# EAGLE board Motorplatine (EAGLE 7.2.0)
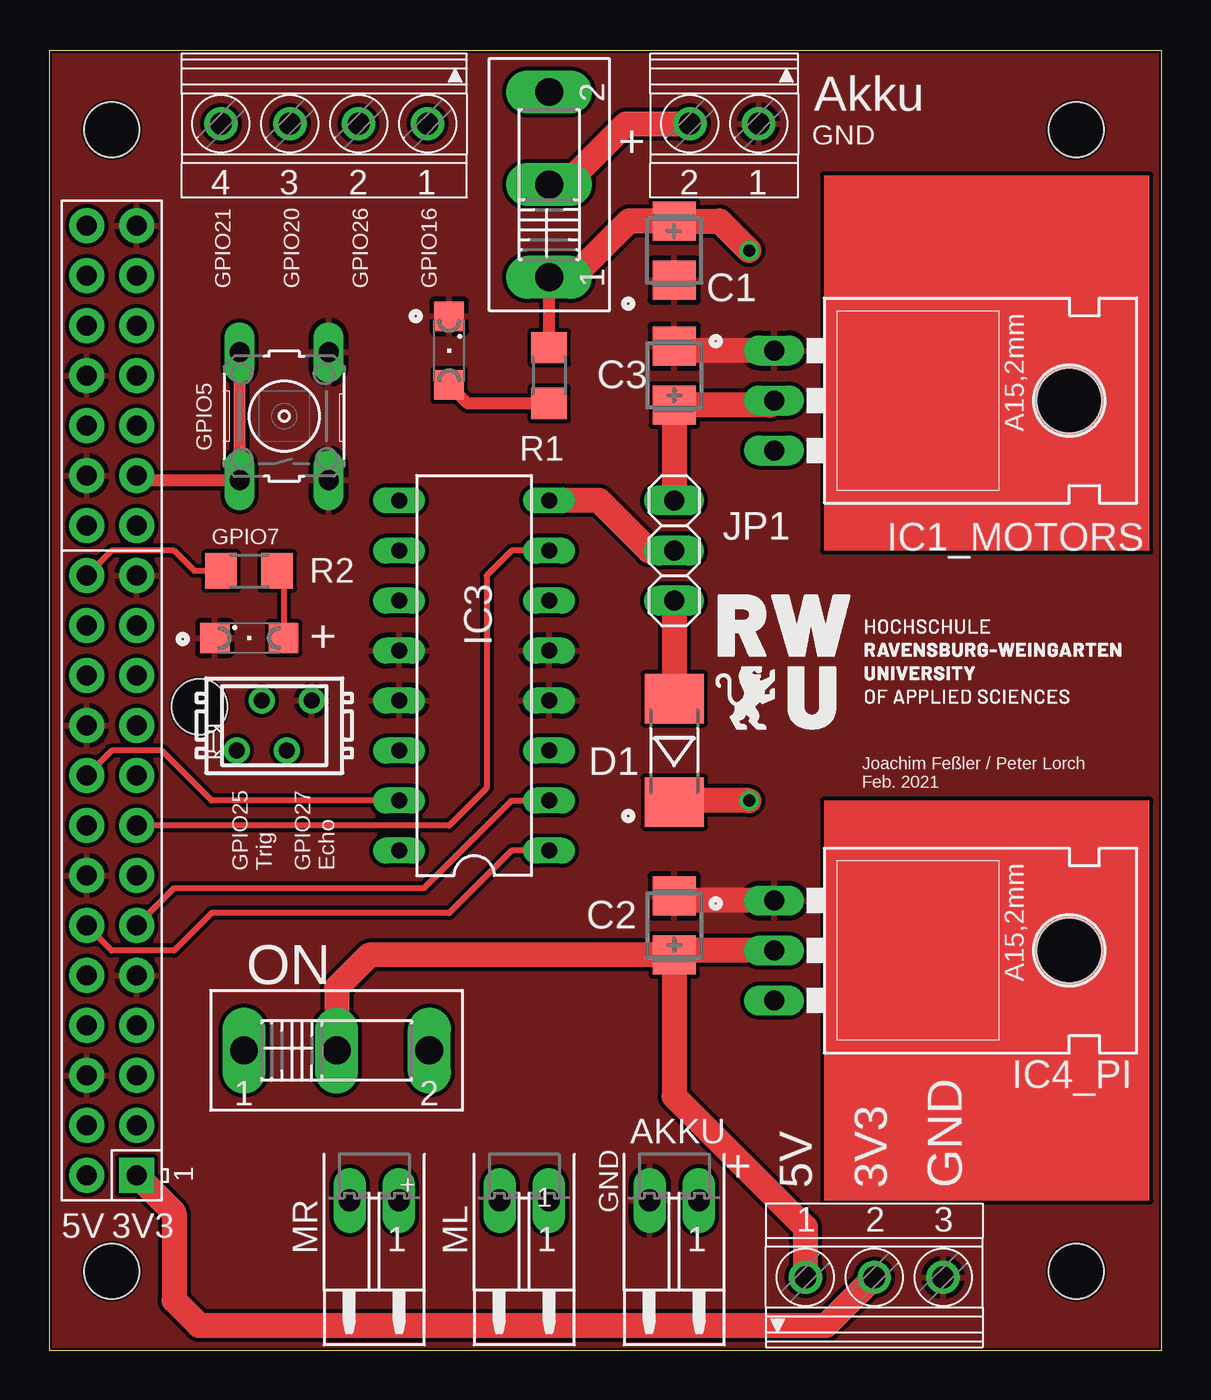
[diagram p0: board, top side]
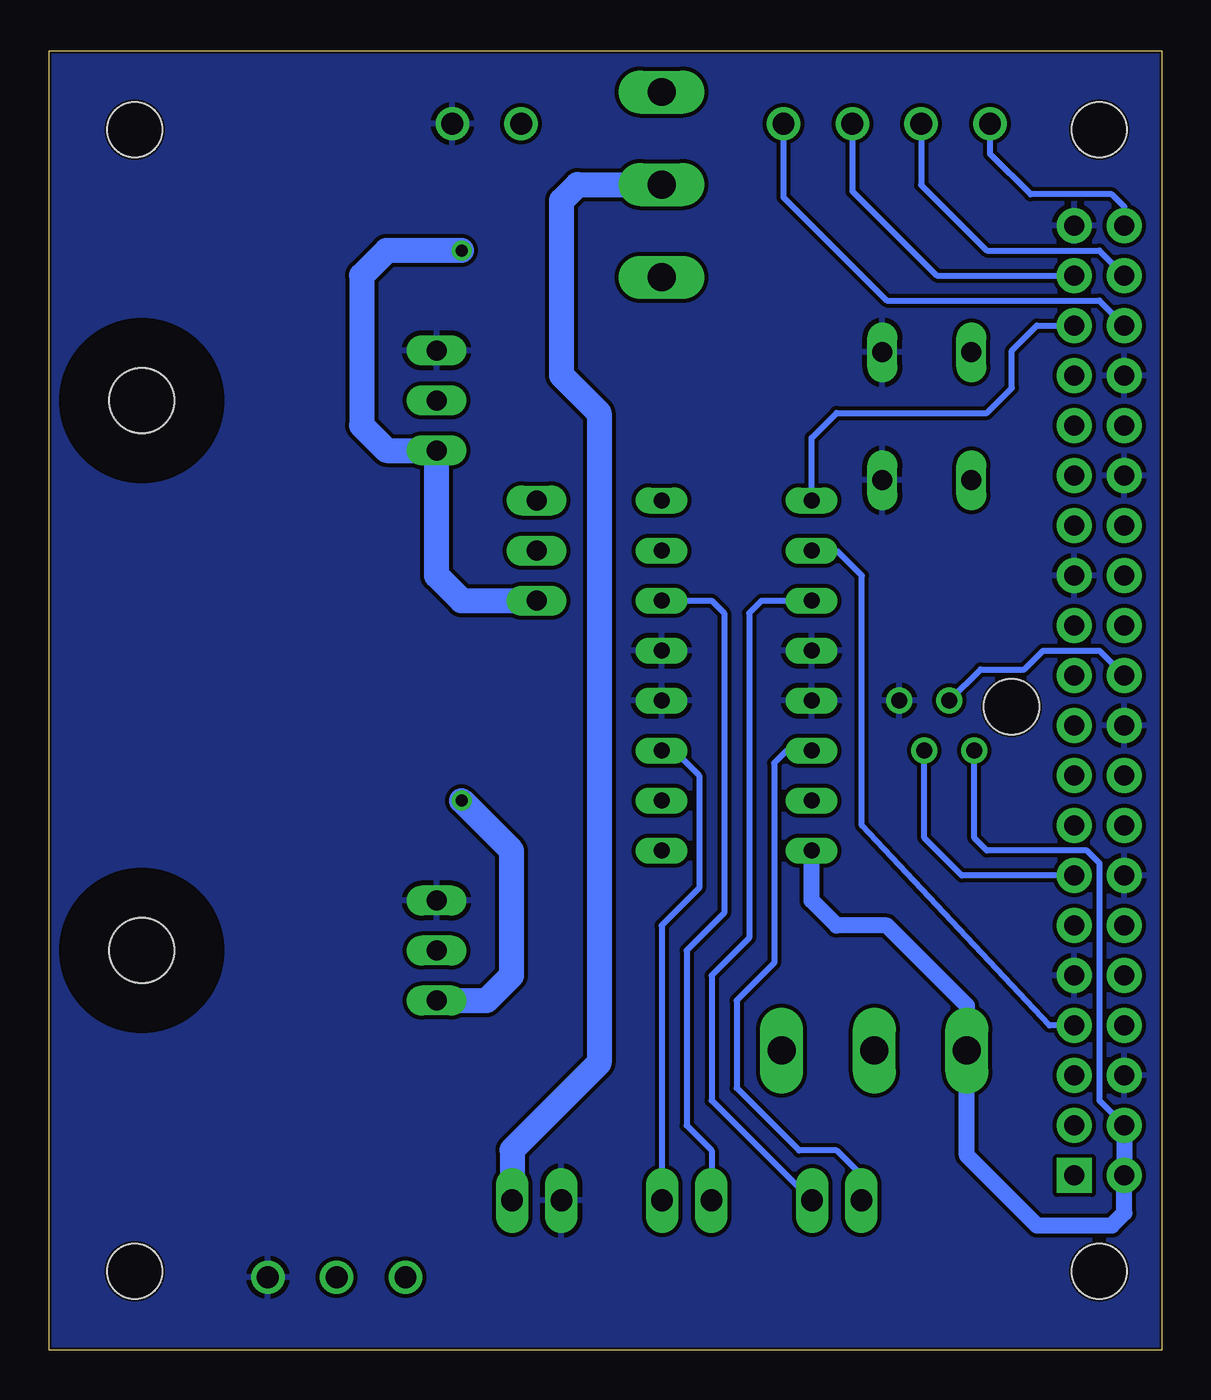
[diagram p1: board, bottom side, seen from below]

Size 56.52 x 66.04 mm. Coordinates in mm from the lower left corner, seen from the top.
Outline: 56.52,66.04 0,66.04 0,0 56.52,0 56.52,66.04
Copper layers (1*16): Top 0.035mm / dielectric 1.5mm / Bottom 0.035mm
Design rules "default *": minimum track width 10mil, minimum drill 24mil, track to track 8mil, track to pad 8mil, pad to pad 8mil, via to via 8mil, smd to smd 8mil, copper to edge 5mil, drill to drill 10mil, minimum pad ring 10mil, minimum via ring 8mil, stop-mask expansion 4mil, vias tented up to drill 0mil, thermal gap 10mil
Holes 2.8 mm at 3.17,4.02 3.17,62.02 52.17,62.02 52.17,4.02 7.63,32.7

## Footprints (pad centres in the part's own frame; a part is rotated, then mirrored left to right if it is on the bottom)
SML1206 = smd 1.5 x 1.5: A 1.75,0; C -1.75,0
02PA = drill 1.1 long: 1 -1.25,0; 2 1.25,0
CT3528 = smd 2 x 2.2: + -1.5,0; - 1.5,0
MELF-MLL41 = smd 2.5 x 3: A 2.625,0; C -2.625,0
317TL = drill 1.016 long: 1 -2.54,-3.81; 2 0,-3.81; 3 2.54,-3.81 | hole 3.302: 0,11.176
DIL16 = drill 0.813 long: 1 -8.89,-3.81; 2 -6.35,-3.81; 3 -3.81,-3.81; 4 -1.27,-3.81; 5 1.27,-3.81; 6 3.81,-3.81; 7 6.35,-3.81; 8 8.89,-3.81; 9 8.89,3.81; 10 6.35,3.81; 11 3.81,3.81; 12 1.27,3.81; 13 -1.27,3.81; 14 -3.81,3.81; 15 -6.35,3.81; 16 -8.89,3.81
1X03 = drill 1.016 long: 1 -2.54,0; 2 0,0; 3 2.54,0
R1206 = smd 1.6 x 1.803: 1 -1.422,0; 2 1.422,0
255SB = drill 1.4 pad 2.184 long: 1 -4.7,0; 2 0,0; 3 4.7,0
B3F-10XX = drill 1.016 long: 1 -3.251,2.261; 2 3.251,2.261; 3 -3.251,-2.261; 4 3.251,-2.261
MICROMATCH-4 = drill 0.813: 1 1.905,1.27; 2 0.635,-1.27; 3 -0.635,1.27; 4 -1.905,-1.27
RASPI_GPIO_B+_PIN = drill 1 pad 1.778 square: 1 -24.13,-1.27 | drill 1 pad 1.778: 2 -24.13,1.27; 3 -21.59,-1.27; 4 -21.59,1.27; 5 -19.05,-1.27; 6 -19.05,1.27; 7 -16.51,-1.27; 8 -16.51,1.27; 9 -13.97,-1.27; 10 -13.97,1.27; 11 -11.43,-1.27; 12 -11.43,1.27; 13 -8.89,-1.27; 14 -8.89,1.27; 15 -6.35,-1.27; 16 -6.35,1.27; 17 -3.81,-1.27; 18 -3.81,1.27; 19 -1.27,-1.27; 20 -1.27,1.27; 21 1.27,-1.27; 22 1.27,1.27; 23 3.81,-1.27; 24 3.81,1.27; 25 6.35,-1.27; 26 6.35,1.27; 27 8.89,-1.27; 28 8.89,1.27; 29 11.43,-1.27; 30 11.43,1.27; 31 13.97,-1.27; 32 13.97,1.27; 33 16.51,-1.27; 34 16.51,1.27; 35 19.05,-1.27; 36 19.05,1.27; 37 21.59,-1.27; 38 21.59,1.27; 39 24.13,-1.27; 40 24.13,1.27
1751264 = drill 1.1 pad 1.7: 1 -5.25,-0.1; 2 -1.75,-0.1; 3 1.75,-0.1; 4 5.25,-0.1
1751248 = drill 1.1 pad 1.7: 1 -1.75,-0.1; 2 1.75,-0.1
1751251 = drill 1.1 pad 1.7: 1 -3.5,-0.1; 2 0,-0.1; 3 3.5,-0.1

## Placement (x,y rotation side)
5V-ON  [SML1206]  20.32,50.8 270 top
5V-ON1  [SML1206]  10.16,36.2 0 top
AKKU  [02PA]  31.75,7.62 180 top
C1  10μF  [CT3528]  31.75,55.88 270 top
C2  10μF  [CT3528]  31.75,21.59 90 top
C3  10μF  [CT3528]  31.75,49.53 90 top
D1  SA265 DIO  [MELF-MLL41]  31.75,30.48 90 top
IC1_MOTORS  LM1084  [317TL]  40.64,48.26 270 top
IC3  L293D  [DIL16]  21.59,34.29 90 top
IC4_PI  LM1084  [317TL]  40.64,20.32 270 top
JP1  [1X03]  31.75,40.64 90 top
ML  [02PA]  24.13,7.62 180 top
MR  [02PA]  16.51,7.62 180 top
R1  560R  [R1206]  25.4,49.53 90 top
R2  560R  [R1206]  10.16,39.6 180 top
S1  [255SB]  25.4,59.23 90 top
S2  [B3F-10XX]  11.94,47.47 90 top
S3  [255SB]  14.61,15.24 0 top
X1  MICROMATCH-4  [MICROMATCH-4]  11.43,31.75 180 top
X2  RASPI_GPIO_B+#_PIN  [RASPI_GPIO_B+_PIN]  3.17,33.02 90 top
X3  1751264  [1751264]  13.97,62.23 180 top
X4  1751248  [1751248]  34.29,62.23 180 top
X5  1751251  [1751251]  41.91,3.81 0 top

## Library data of the parts
5V-ON 5V-ON1 = led-Task
AKKU ML MR = con-amp-quick; OC_FARNELL: unknown; OC_NEWARK: unknown
C1-C3 = rcl
D1 = diode
IC1_MOTORS IC4_PI = Spg.reg
IC3 = st-microelectronics; MPN: L293D; OC_FARNELL: 9589619; OC_NEWARK: 56P8249
JP1 = pinhead
R1 R2 = Widerstände; SPICEPREFIX: R
S1 S3 = switch
S2 = switch-omron; MPN: B3F-1000; OC_FARNELL: 176432; OC_NEWARK: 36M3542
X1 = con-amp-micromatch; MPN: 7-215464-4; OC_FARNELL: 3784629; OC_NEWARK: 19R8124
X2 = raspberrypi_bastelstube_v13
X3 = Con-2-10-RM3,5; MPN: 1751264; OC_FARNELL: unknown; OC_NEWARK: 10R0934
X4 = con-phoenix-350; OC_FARNELL: unknown; OC_NEWARK: unknown
X5 = Con-2-10-RM3,5; OC_FARNELL: unknown; OC_NEWARK: unknown

## Nets
1Y: IC3.3 ML.1
2Y: IC3.6 ML.2
3V3B: X2.17
3Y: IC3.11 MR.1
4Y: IC3.14 MR.2
+3V3: X2.1 X5.2
+5V: C2.+ IC4_PI.2 S3.2 X5.1
ECHO/GPIO27: X1.3 X2.13
GND: 5V-ON1.C 5V-ON.C AKKU.2 C1.- C2.- C3.- IC1_MOTORS.1 IC3.4 IC3.5 IC3.12 IC3.13 IC4_PI.1 S2.3 S2.4 X1.4 X2.6 X2.9 X2.14 X2.20 X2.25 X2.30 X2.34 X2.39 X4.1 X5.3
GPIO5: S2.1 S2.2 X2.29
GPIO16: X2.36 X3.1
GPIO20: X2.38 X3.3
GPIO21: X2.40 X3.4
GPIO26: X2.37 X3.2
M1_E1: IC3.2 X2.11
M1_E2: IC3.7 X2.15
M1_PWM: IC3.1 X2.12
M2_E1: IC3.10 X2.7
M2_E2: IC3.15 X2.18
M2_PWM: IC3.9 X2.35
N$1: 5V-ON1.A R2.1
N$2: R2.2 X2.26
N$3: C3.+ IC1_MOTORS.2 JP1.3
N$5: AKKU.1 S1.2 X4.2
N$7: D1.C IC4_PI.3
N$12: 5V-ON.A R1.1
TRIG/GPIO25: X1.2 X2.22
V+: IC3.16 S3.1 X1.1 X2.2 X2.4
VCC: C1.+ D1.A IC1_MOTORS.3 JP1.1 R1.2 S1.1
VDD: IC3.8 JP1.2

## Tracks (layer width: path | path; a pad name or v marks a point on that pad's centre or on a via)
1Y
  Bottom 0.305: IC3.3 24.77,30.48 23.5,29.21 23.5,23.5 25.4,21.59 25.4,7.64 ML.1
2Y
  Bottom 0.305: IC3.6 22.86,38.1 22.23,37.47 22.23,22.23 24.13,20.32 24.13,11.43 22.86,10.16 22.86,7.64 ML.2
3Y
  Bottom 0.305: IC3.11 20.32,38.1 20.95,37.47 20.95,20.95 22.86,19.05 22.86,12.7 17.76,7.6 MR.1
4Y
  Bottom 0.305: IC3.14 19.05,30.48 19.68,29.84 19.68,19.68 21.59,17.78 21.59,13.34 18.41,10.16 16.51,10.16 15.3,8.95 15.3,7.66 MR.2
+3V3
  Top 1.27: X2.1 6.35,6.99 6.35,2.54 7.62,1.27 39.47,1.27 X5.2
+5V
  Top 1.27: IC4_PI.2 31.98,20.32 C2.+ | C2.+ 31.75,12.91 38.41,6.25 X5.1 | C2.+ 16.28,20.09 14.61,18.41 S3.2
ECHO/GPIO27
  Bottom 0.305: X2.13 10.16,24.13 12.06,26.04 X1.3
GND
  Top 1.27: IC1_MOTORS.1 31.98,50.8 C3.- | IC4_PI.1 31.98,22.86 C2.-
  pour Top: 0,0 0,66.04 56.52,66.04 56.52,0
  pour Bottom: 0,0 0,66.04 56.52,66.04 56.52,0
GPIO5
  Top 0.61: X2.29 4.68,44.22 S2.1 S2.2
GPIO16
  Bottom 0.305: X3.1 19.22,58.59 13.97,53.34 3.17,53.34 X2.36
GPIO20
  Bottom 0.305: X3.3 12.22,59.21 8.89,55.88 3.17,55.88 X2.38
GPIO21
  Bottom 0.305: X2.40 1.91,58.1 2.54,58.74 6.67,58.74 8.72,60.79 X3.4
GPIO26
  Bottom 0.305: X3.2 15.72,58.9 11.43,54.61 X2.37
M1_E1
  Top 0.305: IC3.2 23.5,27.94 19.05,23.5 6.35,23.5 X2.11
M1_E2
  Top 0.305: IC3.7 23.5,40.64 22.23,39.37 22.23,28.57 20.32,26.67 X2.15
M1_PWM
  Top 0.305: IC3.1 23.5,25.4 20.32,22.23 8.26,22.23 6.35,20.32 3.17,20.32 X2.12
M2_E1
  Bottom 0.305: IC3.10 16.51,40.64 15.24,39.37 15.24,26.67 5.71,16.51 X2.7
M2_E2
  Top 0.305: IC3.15 8.26,27.94 5.71,30.48 3.17,30.48 X2.18
M2_PWM
  Bottom 0.305: IC3.9 17.78,46.35 16.51,47.62 8.89,47.62 7.62,48.9 7.62,50.8 6.35,52.07 X2.35
N$1
  Top 0.305: R2.1 11.91,39.36 5V-ON1.A
N$2
  Top 0.305: R2.2 7.39,39.6 6.35,40.64 3.17,40.64 X2.26
N$3
  Top 1.27: IC1_MOTORS.2 36.6,48.03 C3.+ JP1.3
N$5
  Top 1.27: X4.2 29.31,62.33 26.21,59.23 S1.2
  Bottom 1.27: AKKU.1 33,10.18 28.57,14.61 28.57,47.62 30.48,49.53 30.48,58.42 29.67,59.23 S1.2
N$7  (via drill 0.61)
  Top 1.27: v35.56,27.94 31.84,27.94 D1.C
  Bottom 1.27: IC4_PI.3 34.29,17.78 33.02,19.05 33.02,25.4 v35.56,27.94
N$12
  Top 0.61: 5V-ON.A 21.26,48.11 R1.1
TRIG/GPIO25
  Bottom 0.305: X1.2 9.21,34.61 6.99,34.61 6.03,35.56 3.17,35.56 X2.22
V+
  Bottom 0.305: X2.4 3.17,12.7 3.17,24.77 3.81,25.4 8.89,25.4 9.53,26.04 X1.1
  Bottom 0.813: X2.4 X2.2 1.91,6.99 2.54,6.35 6.35,6.35 9.9,9.9 S3.1 9.9,17.52 13.97,21.59 16.51,21.59 17.78,22.86 IC3.16
VCC  (via drill 0.61)
  Top 0.61: R1.2 S1.1
  Top 1.27: JP1.1 D1.A | v35.56,55.88 34.06,57.38 C1.+ 29.44,57.38 26.59,54.53 S1.1
  Bottom 1.27: JP1.1 35.56,38.1 36.83,39.37 IC1_MOTORS.3 39.37,45.72 40.64,46.99 40.64,54.61 39.37,55.88 v35.56,55.88
VDD
  Top 1.27: JP1.2 30.48,40.64 27.94,43.18 IC3.8
(copper drawn outside any net)
  shapes: Top area x2

## Text on the board
tPlace: Joachim Feßler / Peter Lorch / Feb. 2021
tNames: Akku | + | GND | GPIO21 | GPIO20 | GPIO26 | GPIO16 | GPIO5 | GPIO7 | + | GPIO25 / Trig | GPIO27 / Echo | ON | + | + | 5V | 3V3 | GND | 1 | GND | 5V | 3V3
tValues: L293D
_tNames: X4 | S1 | X3 | C1 | IC1 | 5V-ON | R1 | IC3 | C3 | S2 | JP1 | IC4 | D1 | C2 | JP2 | X2 | X1 | M2 | M1 | X5